# EAGLE board Aula 1- Lei de ohm (EAGLE 9.7.0)

Size 370.06 x 172.85 mm. Coordinates in mm from the lower left corner, seen from the top.
Outline: 0,0 370.06,0 370.06,172.85 0,172.85 0,0
Copper layers (1*16): Top 0.035mm / dielectric 1.5mm / Bottom 0.035mm
Design rules "default": minimum track width 6mil, minimum drill 0.35mm, track to track 6mil, track to pad 6mil, pad to pad 6mil, via to via 6mil, smd to smd 6mil, copper to edge 40mil, drill to drill 6mil, minimum pad ring 10mil, minimum via ring 8mil, stop-mask expansion 4mil, vias tented up to drill 0mil, thermal gap 10mil

## Footprints (pad centres in the part's own frame; a part is rotated, then mirrored left to right if it is on the bottom)
BATTERY-GENERIC = drill 1.118 pad 3.15 octagon: + 2.54,0; - -2.54,0
LEDRD254W60D565H860B = drill 0.981 pad 1.581: 1 -1.27,0; 2 1.27,0
RESAD1016W63L850D250B = drill 0.83 pad 1.43: 1 -5.08,0; 2 5.08,0
SWITCH-MOMENTARY-PTH-6.5MM = drill 1.016 pad 1.88: 1 -3.251,2.261; 2 3.251,2.261; 3 -3.251,-2.261; 4 3.251,-2.261

## Placement (x,y rotation side)
BAT1  9V  [BATTERY-GENERIC]  124.16,100.46 90 top
BAT2  9V  [BATTERY-GENERIC]  122.43,32.68 270 top
BAT3  9V  [BATTERY-GENERIC]  33.75,136.13 0 top
BAT5  9V  [BATTERY-GENERIC]  34.11,60.33 0 top
BAT6  9V  [BATTERY-GENERIC]  217.93,129.84 0 top
D1  RED  [LEDRD254W60D565H860B]  18.17,142 180 top
D2  RED  [LEDRD254W60D565H860B]  6.06,64.88 180 top
D3  RED  [LEDRD254W60D565H860B]  253.45,164.94 180 top
D5  RED  [LEDRD254W60D565H860B]  286.47,164.94 180 top
D6  RED  [LEDRD254W60D565H860B]  267.08,35.81 180 top
D7  RED  [LEDRD254W60D565H860B]  300.1,35.81 180 top
P1  BATTERYGENERIC  [BATTERY-GENERIC]  361.8,8.26 180 top
R1  300  [RESAD1016W63L850D250B]  96.99,104.1 180 top
R2  300  [RESAD1016W63L850D250B]  98.2,32.1 90 top
R3  450  [RESAD1016W63L850D250B]  27.14,140.17 180 top
R5  450  [RESAD1016W63L850D250B]  16.33,64.67 180 top
R6  1k  [RESAD1016W63L850D250B]  259.8,162.4 0 top
R7  1k  [RESAD1016W63L850D250B]  287.74,157.32 270 top
R8  62  [RESAD1016W63L850D250B]  273.43,33.27 0 top
R9  62  [RESAD1016W63L850D250B]  301.37,28.19 270 top
S1  SWITCH_MOMENTARY  [SWITCH-MOMENTARY-PTH-6.5MM]  267.42,158.59 90 top
S2  SWITCH_MOMENTARY  [SWITCH-MOMENTARY-PTH-6.5MM]  300.44,158.59 90 top
S3  SWITCH_MOMENTARY  [SWITCH-MOMENTARY-PTH-6.5MM]  281.05,29.46 90 top
S4  SWITCH_MOMENTARY  [SWITCH-MOMENTARY-PTH-6.5MM]  314.07,29.46 90 top

## Library data of the parts
BAT1-BAT3 BAT5 BAT6 P1 R1-R3 R5-R9 S1-S4 = Tinkercad
D1-D3 D5-D7 = Tinkercad; CATEGORY: Opto-Electronic; SUB-CATEGORY: LED; VALUE: LED_RED

## Nets
BAT1+: BAT1.+ R1.1
BAT1-: BAT1.- R1.2
BAT2+: BAT2.+ R2.1
BAT3+: BAT3.+ R3.1
BAT5+: BAT5.+ R5.1
BAT5-: BAT5.- D2.2
BAT6+: BAT6.+ S1.3 S1.4 S2.3 S2.4
BAT6-: BAT6.- D3.2 D5.2
D1_A: D1.1 R3.2
D2_A: D2.1 R5.2
D3_A: D3.1 R6.1
D5_A: D5.1 R7.1
D6_A: D6.1 R8.1
D7_A: D7.1 R9.1
P1+: P1.+ S3.3 S3.4 S4.3 S4.4
P1-: D6.2 D7.2 P1.-
S1_2: R6.2 S1.1 S1.2
S2_2: R7.2 S2.1 S2.2
S3_2: R8.2 S3.1 S3.2
S4_1: R9.2 S4.1 S4.2

## Tracks (layer width: path | path; a pad name or v marks a point on that pad's centre or on a via)
BAT1+  (1 unrouted)
BAT1-  (1 unrouted)
BAT2+  (1 unrouted)
BAT3+  (1 unrouted)
BAT5+  (1 unrouted)
BAT5-  (1 unrouted)
BAT6+  (4 unrouted)
BAT6-  (2 unrouted)
D1_A  (1 unrouted)
D2_A  (1 unrouted)
D3_A  (1 unrouted)
D5_A  (1 unrouted)
D6_A  (1 unrouted)
D7_A  (1 unrouted)
P1+  (4 unrouted)
P1-  (2 unrouted)
S1_2  (2 unrouted)
S2_2  (2 unrouted)
S3_2  (2 unrouted)
S4_1  (2 unrouted)